# Altium PCB PCB2.PcbDoc
Units mil, origin at the board's own origin, x right, y up, seen from the top; angles counter-clockwise.
Board outline 6000 x 4000 mil, 2 copper layers (Top Layer, Bottom Layer); 47 components, 40 nets, 161 pads, 0 vias.
Unrouted connection lines stored in the file: 100.
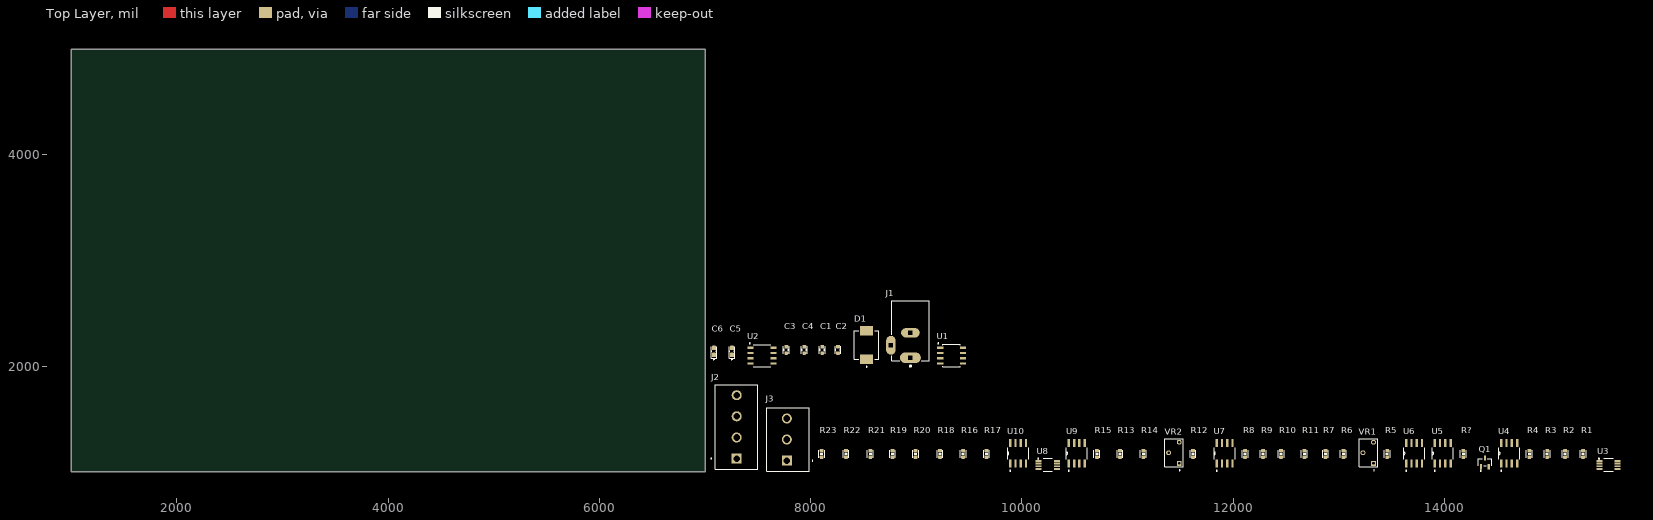
[diagram p0: Top Layer view]
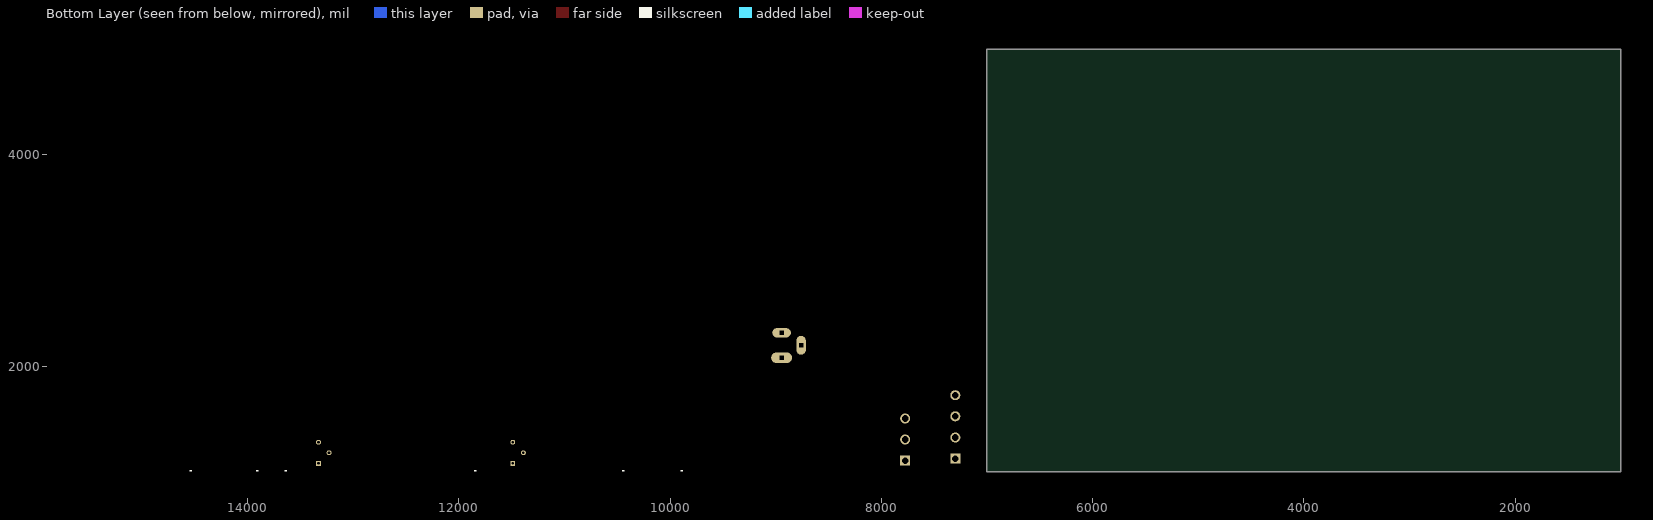
[diagram p1: Bottom Layer view, seen from below]

## Layer stack, top to bottom
Top Solder: solder mask 0.4, Solder Resist, Dk 3.5
Top Layer: signal copper 1.4
Dielectric 1: dielectric 12.6, FR-4, Dk 4.8
Bottom Layer: signal copper 1.4
Bottom Solder: solder mask 0.4, Solder Resist, Dk 3.5

## Board outline
1000,1000 7000,1000 7000,5000 1000,5000

## Design rules (kind name [scope] priority, off if disabled: settings)
Clearance [All] p1: gap=10 ignorepadtopadclearanceinfootprint=FALSE
PolygonConnect [All] p1: connectstyle=Relief reliefconductorwidth=10 reliefentries=4 polygonreliefangle="90 Angle" airgapwidth=10
RoutingVias [All] p1: holewidth=28 width=50 viastyle="Through Hole" minholewidth=28 minwidth=50 maxholewidth=28 maxwidth=50
SolderMaskExpansion [All] p1: expansion=4 istentingtop=FALSE
SupplyNets "Schematic Supply Nets_3" [InNet('-5')] p1: voltage=0.000
SupplyNets "Schematic Supply Nets_2" [InNet('+5')] p2: voltage=0.000
SupplyNets "Schematic Supply Nets_1" [InNet('GND')] p3: voltage=0.000
SupplyNets "Schematic Supply Nets" [InNet('Vout+')] p4: voltage=0.000
Width [All] p1: maxlimit=10 minlimit=10 preferedwidth=10
30 further rules are at their usual default settings.

## Classes and differential pairs
component class power: C1 C2 C3 C4 C5 C6 D1 J1 L1 U1 U2
component class loadcell: J2 J3 Q1 R1 R2 R3 R4 R5 R6 R7 R8 R9 R10 R11 R12 R13 R14 R15 R16 R17 R18 R19 R20 R21 R22 R23 R? U3 U4 U5 U6 U7 U8 U9 U10 VR1 VR2

## Components (designator, comment, footprint, x,y, rotation, side; value= is the part's Value field where it differs from the comment)
C1 "220uF/16V" CAP_C_1608X80 8110,2155 r90 top value=33pF
C2 "1uF/16V" CAP_C_1608X80 8260,2155 r90 top value=33pF
C3 "220uF/16V" CAP_C_1608X80 7770,2155 r90 top value=33pF
C4 "1uF/16V" CAP_C_1608X80 7940,2155 r90 top value=33pF
C5 "10uF/16V" CAP_MP_1608X90 7255,2140 r90 top
C6 "10uF/16V" CAP_MP_1608X90 7085,2140 r90 top
D1 "SS34" DIOM7959X265N 8530,2200 r90 top
J1 "PJ-002AH" CUI_PJ-002AH 8945,2080 r90 top
J2 "TB004-508-04BE" CUI_TB004-508-04BE 7300,1125 r90 top
J3 "TB007-508-03BE" CUI_TB007-508-03BE 7775,1105 r90 top
Q1 "2N7002" SOT-23TO-236_318-08_ONS 14385,1090 r0 top
R1 "10k" RES_C_1608X60 15315,1170 r90 top
R2 "3.3" RES_C_1608X60 15145,1170 r90 top
R3 "100" RES_C_1608X60 14975,1170 r90 top
R4 "50" RES_C_1608X60 14805,1170 r90 top
R5 "100k" RES_C_1608X60 13460,1170 r90 top
R6 "10k" RES_C_1608X60 13045,1170 r90 top
R7 "100k" RES_C_1608X60 12875,1170 r90 top
R8 "100" RES_C_1608X60 12115,1170 r90 top
R9 "100" RES_C_1608X60 12285,1170 r90 top
R10 "100" RES_C_1608X60 12455,1170 r90 top
R11 "10" RES_C_1608X60 12675,1170 r90 top
R12 "1.6M" RES_C_1608X60 11620,1170 r90 top
R13 "1.1k" RES_C_1608X60 10930,1170 r90 top
R14 "1.1k" RES_C_1608X60 11150,1170 r90 top
R15 "32k" RES_C_1608X60 10710,1170 r90 top
R16 "750" RES_C_1608X60 9445,1170 r90 top
R17 "750" RES_C_1608X60 9665,1170 r90 top
R18 "32k" RES_C_1608X60 9225,1170 r90 top
R19 "10k" RES_C_1608X60 8775,1170 r90 top
R20 "10k" RES_C_1608X60 8995,1170 r90 top
R21 "100" RES_C_1608X60 8565,1170 r90 top
R22 "1M" RES_C_1608X60 8335,1170 r90 top
R23 "1.6M" RES_C_1608X60 8105,1170 r90 top
R? "1k" RES_C_1608X60 14180,1170 r90 top
U1 "XL1509-5.0" SOP8SOIC-8_UMW 9335,2100 r0 top
U2 "ICL7662CBA+T" 21-0041B_8_MXM 7540,2100 r0 top
U3 "INA333AIDGKR" DGK0008A-MFG 15555,1065 r0 top
U4 "OP07CDR" D8 14615,1175 r90 top
U5 "OP07CDR" D8 13985,1175 r90 top
U6 "OP07CDR" D8 13715,1175 r90 top
U7 "OP07CDR" D8 11920,1175 r90 top
U8 "INA333AIDGKR" DGK0008A-MFG 10245,1065 r0 top
U9 "OP07CDR" D8 10520,1175 r90 top
U10 "OP07CDR" D8 9965,1175 r90 top
VR1 "3266W-1-203LF" TRIM_3266W-1-203LF 13330,1180 r90 top
VR2 "3266W-1-203LF" TRIM_3266W-1-203LF 11490,1180 r90 top

## Footprints (in the part's own frame and the unit in brackets; to place one, negate y for a bottom-side part, rotate by r counter-clockwise, add the part's x,y. Pads: shape width x height; smd on the part's side, far side on the other; paste and mask are expansions set on the pad)
21-0041B_8_MXM [mil]
  rect 57.5x21 smd paste+0 mask+0: 1(-107.25,75) 2(-107.25,25) 3(-107.25,-25) 4(-107.25,-75) 5(107.25,-75) 6(107.25,-25) 7(107.25,25) 8(107.25,75)
  silkscreen extent -120,-104 84,120, body extent -122,-99 122,99, height 69
CAP_C_1608X80 [mm] "Chip Capacitor, 2-Leads, Body 1.60x0.80mm, IPC Medium Density"
  rrect50% 0.85x0.95 smd: 1(-0.775,0) 2(0.775,0)
  silkscreen extent -0.9,-0.7 0.9,0.7, body extent -0.87,-0.48 0.87,0.48, height 0.85
CAP_MP_1608X90 [mm] "Molded Capacitor, 2-Leads, Body 1.60x0.85mm, IPC Medium Density"
  rrect50% 1.1x1 smd mask+0.102: 1(-0.85,0) 2(0.85,0)
  silkscreen extent -2.1,-0.7 1.1,0.7, body extent -0.8,-0.43 0.8,0.43, height 1
CUI_PJ-002AH [mm]
  oval 2.5x5 hole 1 square: 1(0,0)
  oval 2.25x4.5 hole 1 square: 2(6,0)
  oval 4.5x2.25 hole 1 square: 3(3,4.7)
  silkscreen extent -2.2,-4.5 13.7,4.5, body extent -0.68,-4.5 13.72,4.9, height 11.1
CUI_TB004-508-04BE [mm]
  rect 2.4x2.4 / inner round 2.4 / far side rect 2.4x2.4 hole 1.6: 1(0,0)
  round 2.4 hole 1.6: 2(5.08,0) 3(10.16,0) 4(15.24,0)
  silkscreen extent -2.54,-5.1 17.78,6.2, body extent -3.14,-5.08 17.78,5.12, height 14.1
CUI_TB007-508-03BE [mm]
  rect 2.4x2.4 / inner round 2.4 / far side rect 2.4x2.4 hole 1.6: 1(0,0)
  round 2.4 hole 1.6: 2(5.08,0) 3(10.16,0)
  silkscreen extent -2.54,-6.25 12.7,4.87, body extent -2.46,-5.33 13.38,4.92, height 14
D8 [mil]
  rect 78x22 smd paste-39 mask-39: 1(-97,75) 2(-97,25) 3(-97,-25) 4(-97,-75) 5(97,-75) 6(97,-25) 7(97,25) 8(97,75)
  silkscreen extent -170,-98 54,98, body extent -122,-99 122,99, height 69
DGK0008A-MFG [mm]
  rect 1.45x0.45 smd paste+0 mask+0: 1(-2.2,0.975) 2(-2.2,0.325) 3(-2.2,-0.325) 4(-2.2,-0.975) 5(2.2,-0.975) 6(2.2,-0.325) 7(2.2,0.325) 8(2.2,0.975)
  silkscreen extent -2.41,-1.55 1.1,1.65
DIOM7959X265N [mm]
  rect 2.25x3.18 smd paste+0 mask+0.102: A(3.455,0) C(-3.455,0)
  silkscreen extent -5.3,-2.95 3.44,2.95, body extent -3.95,-2.95 3.95,2.85, height 2.19
RES_C_1608X60 [mm] "Chip Resistor, 2-Leads, Body 1.63x0.83mm, IPC High Density"
  rrect50% 0.85x0.95 smd: 1(-0.775,0) 2(0.775,0)
  silkscreen extent -0.9,-0.7 0.9,0.7, body extent -0.87,-0.48 0.87,0.48, height 0.6
SOP8SOIC-8_UMW [mil]
  rect 57.5x22 smd paste+0 mask+0: 1(-107.25,75) 2(-107.25,25) 3(-107.25,-25) 4(-107.25,-75) 5(107.25,-75) 6(107.25,-25) 7(107.25,25) 8(107.25,75)
  silkscreen extent -130,-106 84,120, body extent -122,-101 122,101, height 69
SOT-23TO-236_318-08_ONS [mil]
  rect 22x50 smd paste+0 mask+0: 1(-37.5,-41) 2(37.5,-41) 3(0,41)
  silkscreen extent -65,-85 65,32, body extent -60,-52 60,52, height 44
TRIM_3266W-1-203LF [mm]
  rect 1.168x1.168 hole 0.66: 1(-2.54,0)
  round 1.168 hole 0.66: 2(0,2.54) 3(2.54,0)
  silkscreen extent -4.3,-1.02 3.35,3.48, body extent -3.35,-0.98 3.35,3.52, height 8.84

## Part data
C1 C2 C3 C4: library part CAP_SMD, "CAP_Chip"
C5 C6: library part CAP_TH, "CAP_Polarization", LatestRevisionDate=17-Jul-2002, LatestRevisionNote="Re-released for DXP Platform.", PackageReference=POLAR0.8, Published=8-Jun-2000, Publisher="Altium Limited"
D1: "Diode Schottky 40 V 3A Surface Mount SMC (DO-214AB)", Package="SMC-2 ON Semiconductor", Check_prices=https://www.snapeda.com/parts/SS34/Onsemi/view-part/?ref=eda, MF=onsemi, MP=SS34, SnapEDA_Link=https://www.snapeda.com/parts/SS34/Onsemi/view-part/?ref=snap
J1: "2.0 x 6.5 mm, 5.0 A, Horizontal, Through Hole, Dc Power Jack Connector", Package=None, Check_prices=https://www.snapeda.com/parts/PJ-002AH/Same+Sky/view-part/?ref=eda, MF="Same Sky", MP=PJ-002AH, SnapEDA_Link=https://www.snapeda.com/parts/PJ-002AH/Same+Sky/view-part/?ref=snap
J2 J3: "2~24 Poles, Screw Type, Horizontal, 5.08 Pitch, 24~12 (AWG), Terminal Block Connector", Package=None, MF="Same Sky"
  J2: Check_prices=https://www.snapeda.com/parts/TB004-508-04BE/Same+Sky/view-part/?ref=eda, MP=TB004-508-04BE, SnapEDA_Link=https://www.snapeda.com/parts/TB004-508-04BE/Same+Sky/view-part/?ref=snap
  J3: Check_prices=https://www.snapeda.com/parts/TB007-508-03BE/Same+Sky/view-part/?ref=eda, MP=TB007-508-03BE, SnapEDA_Link=https://www.snapeda.com/parts/TB007-508-03BE/Same+Sky/view-part/?ref=snap
Q1: "Description", Manufacturer_Name=onsemi, Copyright="Copyright (C) 2025 Ultra Librarian. All rights reserved.", Manufacturer_Part_Number=2N7002
R1 R2 R3 R4 R5 R6 R7 R8 R9 R10 R11 R12 R13 R14 R15 R16 R17 R18 R19 R20 R21 R22 R23 R?: library part _RES_B_2, "RES"
U1: "Description", Manufacturer_Name="UMW(Youtai Semiconductor Co., Ltd.)", Copyright="Copyright (C) 2025 Ultra Librarian. All rights reserved.", Manufacturer_Part_Number=XL1509-5.0, RefDes=RefDes, TYPE=Type
U2: "CMOS Voltage Converters", Manufacturer_Name="Analog Devices / Maxim Integrated", Copyright="Copyright (C) 2025 Ultra Librarian. All rights reserved.", Manufacturer_Part_Number=ICL7662CBA+T, RefDes=RefDes, TYPE=Type
U3 U8: "Low-Power, Zero-Drift, Precision Instrumentation Amplifier 8-VSSOP -40 to 125", Manufacturer_Name="Texas Instruments", Copyright="Copyright (C) 2025 Ultra Librarian. All rights reserved.", Manufacturer_Part_Number=INA333AIDGKR, RefDes=RefDes, TYPE=TYPE
U4 U5 U6 U7 U9 U10: "Low-offset voltage, single operational amplifier with external input offset voltage adjustment 8-SOIC 0 to 70", Manufacturer_Name="Texas Instruments", Copyright="Copyright (C) 2025 Ultra Librarian. All rights reserved.", Manufacturer_Part_Number=OP07CDR, RefDes=RefDes, TYPE=Type
VR1 VR2: "20 kOhms 0.25W, 1/4W PC Pins Through Hole Trimmer Potentiometer Cermet 12 Turn Top Adjustment", Package="TO-218 Bourns", Availability=Warning, Check_prices=https://www.snapeda.com/parts/3266W-1-203LF/Bourns/view-part/427237/?ref=eda, MF=Bourns, MP=3266W-1-203LF, Price=None, Purchase-URL=https://pricing.snapeda.com/search/part/3266W-1-203LF/?ref=eda, SnapEDA_Link=https://www.snapeda.com/parts/3266W-1-203LF/Bourns/view-part/427237/?ref=snap

## Nets (pads, with @x,y where several pads share a name; then routed paths per layer and width w, separated by ;. In a path a pad name is that pad's centre, name@x,y a point inside that pad or via, vN(x,y) a via of type N, cw(c..) or ccw(c..) an arc to the next point about the centre after c; other vN are vias at no path point)
+5: C3.2 C4.2 J2.1 R13.1 R14.1 U1.3 U2.8 U6.7 U7.7 VR1.3 VR2.3
-5: C6.2 U2.5 U3.4 U4.4 U5.4 U6.4 U7.4 U8.4 U9.4 U10.4
ADC_in: U10.2 U10.6
GND: C1.1 C2.1 C3.1 C4.1 C6.1 D1.A J1.2 J1.3 J2.4 J3.3 R5.1 R8.1 R12.1 U1.4 U1.5 U1.6 U1.7 U1.8 U2.3 U8.5 VR1.1 VR2.1
Loadcell_V+: J2.3 U3.3
Loadcell_V-: J2.2 U3.2
NetC5_1: C5.1 U2.2
NetC5_2: C5.2 U2.4
NetD1_C: D1.C U1.2
NetQ1_1: Q1.1 R?.2
NetQ1_2: Q1.2 R11.2
NetQ1_3: Q1.3 R4.1
NetR1_1: R1.1 R6.1 U5.3
NetR1_2: R1.2 U3.6
NetR3_1: R3.1 U3.8
NetR3_2: R3.2 U3.1
NetR5_2: R5.2 R7.1 U5.2
NetR6_2: R6.2 U6.2 U6.6
NetR7_2: R7.2 U4.3 U5.6
NetR8_2: R8.2 R9.1
NetR9_2: R9.2 R10.1
NetR10_2: R10.2 R11.1
NetR12_2: R12.2 R15.2 U9.3
NetR13_2: R13.2 R16.1
NetR14_2: R14.2 R17.1
NetR17_2: R17.2 R21.1 U8.2
NetR18_2: R18.2 R23.1 U9.2
NetR19_1: R19.1 R20.2 U7.2
NetR19_2: R19.2 U8.6
NetR22_1: R22.1 U8.8
NetR22_2: R22.2 U8.1
NetR23_2: R23.2 U9.6 U10.3
NetR?_1: R?.1 U4.2 U4.6
NetU6_3: U6.3 VR1.2
NetU7_3: U7.3 VR2.2
RTD_BLUE: J3.2 R21.2
RTD_RED: J3.1 R16.2 U8.3
Vcalib: R20.1 U3.5 U7.6
Vout+: C1.2 C2.2 J1.1 R2.2 R15.1 U1.1 U3.7 U4.7 U5.7 U8.7 U9.7 U10.7
Vout-: R2.1 R4.2 R18.1
pads on no net: U2.1 U2.6 U2.7 U4.1 U4.5 U4.8 U5.1 U5.5 U5.8 U6.1 U6.5 U6.8 U7.1 U7.5 U7.8 U9.1 U9.5 U9.8 U10.1 U10.5 U10.8

## Text inside footprints (layer, text, board x,y; h text height)
U1: Mechanical 13 "*" at 9259,2147.5 h50